# EAGLE board speedreadout (EAGLE 4.16)
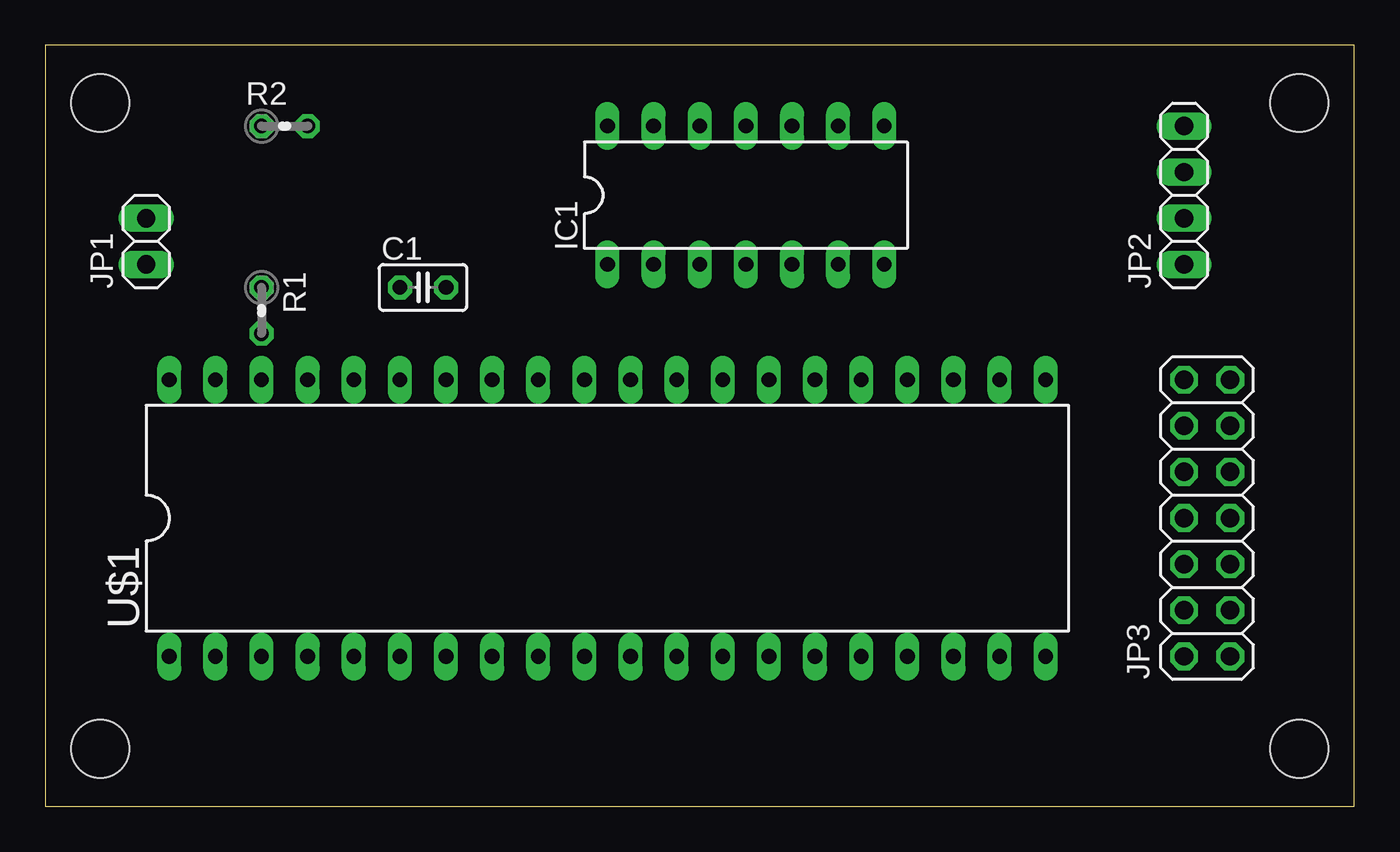
[diagram p0: board, top side]
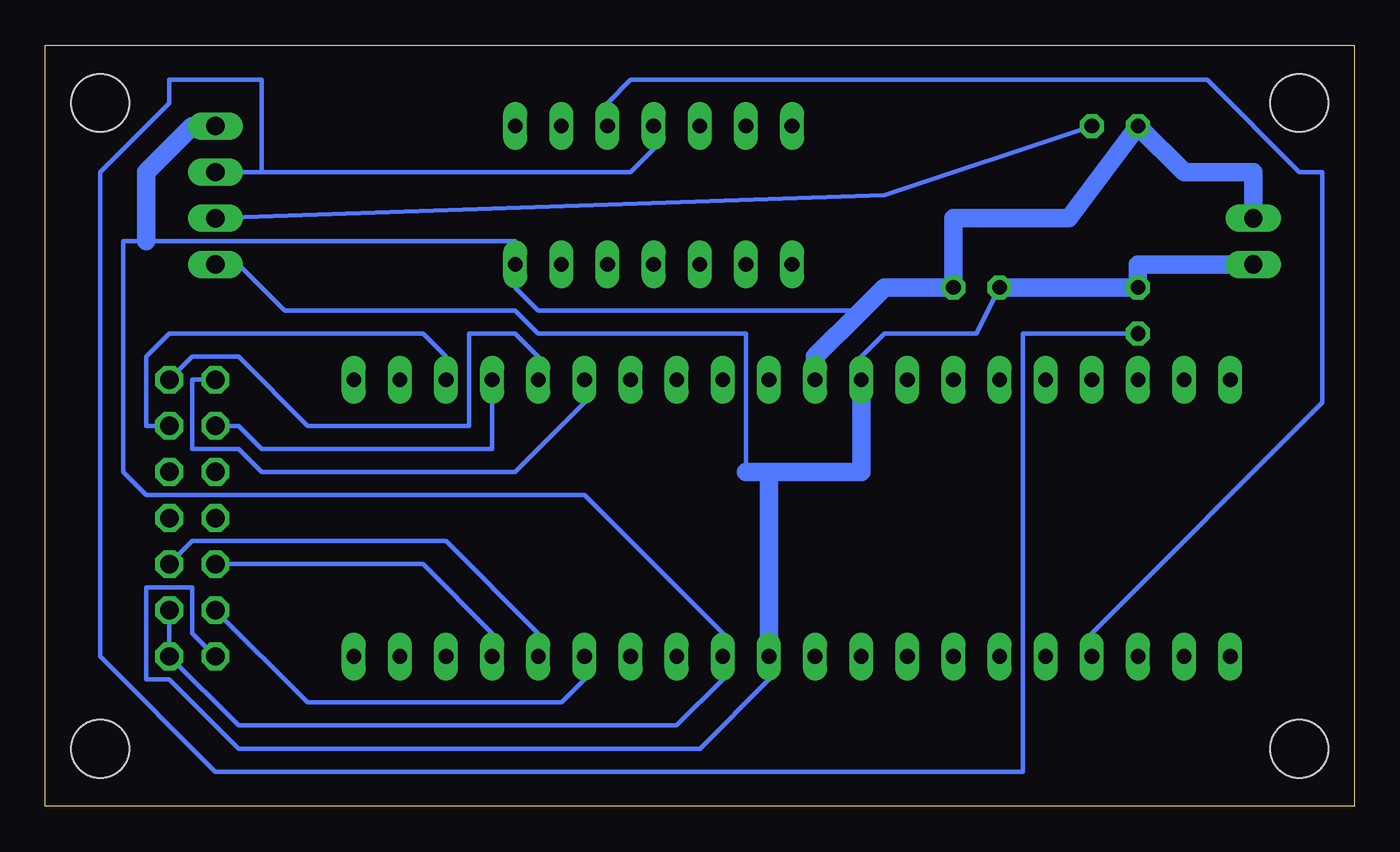
[diagram p1: board, bottom side, seen from below]

Size 72.06 x 41.9 mm. Coordinates in mm from the lower left corner, seen from the top.
Outline: 0,0 72.06,0 72.06,41.9 0,41.9 0,0
Copper layers (1*16): Top 0.035mm / dielectric 1.5mm / Bottom 0.035mm
Design rules "default": minimum track width 10mil, minimum drill 24mil, track to track 8mil, track to pad 8mil, pad to pad 8mil, via to via 8mil, smd to smd 8mil, copper to edge 40mil, drill to drill 8mil, minimum pad ring 10mil, minimum via ring 8mil, stop-mask expansion 4mil, vias tented up to drill 0mil, thermal gap 10mil
Holes 3.2 mm at 3.01,38.73 69.05,38.73 69.05,3.17 3.01,3.17

## Footprints (pad centres in the part's own frame; a part is rotated, then mirrored left to right if it is on the bottom)
C025-025X050 = drill 0.813 octagon: 1 -1.27,0; 2 1.27,0
DIL14 = drill 0.813 long: 1 -7.62,-3.81; 2 -5.08,-3.81; 3 -2.54,-3.81; 4 0,-3.81; 5 2.54,-3.81; 6 5.08,-3.81; 7 7.62,-3.81; 8 7.62,3.81; 9 5.08,3.81; 10 2.54,3.81; 11 0,3.81; 12 -2.54,3.81; 13 -5.08,3.81; 14 -7.62,3.81
1X02 = drill 1.016 long: 1 -1.27,0; 2 1.27,0
1X04 = drill 1.016 long: 1 -3.81,0; 2 -1.27,0; 3 1.27,0; 4 3.81,0
2X07 = drill 1.016 octagon: 1 -7.62,-1.27; 2 -7.62,1.27; 3 -5.08,-1.27; 4 -5.08,1.27; 5 -2.54,-1.27; 6 -2.54,1.27; 7 0,-1.27; 8 0,1.27; 9 2.54,-1.27; 10 2.54,1.27; 11 5.08,-1.27; 12 5.08,1.27; 13 7.62,-1.27; 14 7.62,1.27
0204V = drill 0.813 octagon: 1 -1.27,0; 2 1.27,0
DIL40 = drill 0.813 long: 1 -24.13,-7.62; 2 -21.59,-7.62; 3 -19.05,-7.62; 4 -16.51,-7.62; 5 -13.97,-7.62; 6 -11.43,-7.62; 7 -8.89,-7.62; 8 -6.35,-7.62; 9 -3.81,-7.62; 10 -1.27,-7.62; 11 1.27,-7.62; 12 3.81,-7.62; 13 6.35,-7.62; 14 8.89,-7.62; 15 11.43,-7.62; 16 13.97,-7.62; 17 16.51,-7.62; 18 19.05,-7.62; 19 21.59,-7.62; 20 24.13,-7.62; 21 24.13,7.62; 22 21.59,7.62; 23 19.05,7.62; 24 16.51,7.62; 25 13.97,7.62; 26 11.43,7.62; 27 8.89,7.62; 28 6.35,7.62; 29 3.81,7.62; 30 1.27,7.62; 31 -1.27,7.62; 32 -3.81,7.62; 33 -6.35,7.62; 34 -8.89,7.62; 35 -11.43,7.62; 36 -13.97,7.62; 37 -16.51,7.62; 38 -19.05,7.62; 39 -21.59,7.62; 40 -24.13,7.62

## Placement (x,y rotation side)
C1  0.01u  [C025-025X050]  20.79,28.57 0 top
IC1  7414N  [DIL14]  38.57,33.65 0 top
JP1  PWR  [1X02]  5.55,31.11 90 top
JP2  SENSOR  [1X04]  62.7,33.65 90 top
JP3  LCD  [2X07]  63.97,15.87 90 top
R1  10k  [0204V]  11.9,27.3 270 top
R2  150  [0204V]  13.17,37.46 0 top
U$1  PIC18F4331  [DIL40]  30.95,15.87 0 top

## Library data of the parts
C1 R1 R2 = rcl
IC1 = 74xx-us
JP1 JP2 = pinhead
JP3 = pinhead-1
U$1 = microchip-pic18fxx5x

## Nets
GND: C1.2 IC1.7 JP1.2 JP2.4 JP3.1 JP3.3 R2.1 U$1.12 U$1.31
N$1: C1.1 JP1.1 JP2.1 JP3.2 R1.1 U$1.11 U$1.32
N$3: JP3.4 U$1.15
N$4: JP3.5 U$1.16
N$5: JP2.2 R2.2
N$6: IC1.11 JP2.3 R1.2
N$7: IC1.10 U$1.4
N$8: JP3.6 U$1.17
N$9: JP3.14 U$1.26
N$10: JP3.13 U$1.25
N$11: JP3.12 U$1.24
N$12: JP3.11 U$1.23
VCC: IC1.14

## Tracks (layer width: path | path; a pad name or v marks a point on that pad's centre or on a via)
GND
  Bottom 0.254: JP3.3 JP3.1 61.43,4.44 37.3,4.44 34.76,6.98 U$1.12 34.76,9.52 42.38,17.14 66.51,17.14 67.78,18.41 67.78,31.11 66.51,31.11 46.19,31.11 IC1.7 46.19,28.57 44.92,27.3 27.14,27.3
  Bottom 1.016: JP1.2 5.55,34.92 9.36,34.92 R2.1 15.71,32.38 22.06,32.38 C1.2 25.87,28.57 27.14,27.3 29.68,24.76 U$1.31 | 66.51,31.11 66.51,34.92 63.97,37.46 JP2.4
N$1
  Bottom 0.254: C1.1 20.79,26.03 25.87,26.03 27.14,24.76 U$1.32 | JP3.2 63.97,9.52 63.97,12.06 66.51,12.06 66.51,6.98 65.24,6.98 61.43,3.17 36.03,3.17 32.22,6.98 U$1.11 | 33.49,18.41 33.49,26.03 44.92,26.03 46.19,27.3 58.89,27.3 61.43,29.84 JP2.1
  Bottom 1.016: JP1.1 11.9,29.84 R1.1 C1.1 | 32.22,18.41 27.14,18.41 U$1.32 | 32.22,18.41 U$1.11 | 32.22,18.41 33.49,18.41
N$3
  Bottom 0.254: JP3.4 57.62,5.71 43.65,5.71 42.38,6.98 U$1.15
N$4
  Bottom 0.254: JP3.5 63.97,14.6 50,14.6 44.92,9.52 U$1.16
N$5
  Bottom 0.254: R2.2 25.87,33.65 JP2.2
N$6
  Bottom 0.254: R1.2 18.25,26.03 18.25,1.9 62.7,1.9 69.05,8.25 69.05,34.92 65.24,38.73 65.24,40 60.16,40 60.16,34.92 | 60.16,34.92 JP2.3 | 60.16,34.92 39.84,34.92 38.57,36.19 IC1.11
N$7
  Bottom 0.254: U$1.4 14.44,9.52 1.74,22.22 1.74,34.92 3.01,34.92 8.09,40 39.84,40 41.11,38.73 IC1.10
N$8
  Bottom 0.254: JP3.6 51.27,13.33 47.46,9.52 U$1.17
N$9
  Bottom 0.254: JP3.14 63.97,23.49 63.97,19.68 61.43,19.68 60.16,18.41 46.19,18.41 42.38,22.22 U$1.26
N$10
  Bottom 0.254: JP3.13 63.97,24.76 61.43,24.76 57.62,20.95 48.73,20.95 48.73,26.03 46.19,26.03 44.92,24.76 U$1.25
N$11
  Bottom 0.254: JP3.12 61.43,20.95 60.16,19.68 47.46,19.68 U$1.24
N$12
  Bottom 0.254: JP3.11 66.51,20.95 66.51,24.76 65.24,26.03 51.27,26.03 50,24.76 U$1.23